# Altium PCB mcu.PcbDoc (part 2 of 3)
Units mil, origin at the board's own origin, x right, y up, seen from the top; angles counter-clockwise.
Board outline 2000 x 2000 mil, 2 copper layers (Top Layer, Bottom Layer); 145 components, 109 nets, 608 pads, 708 vias.
Unrouted connection lines stored in the file: 2.
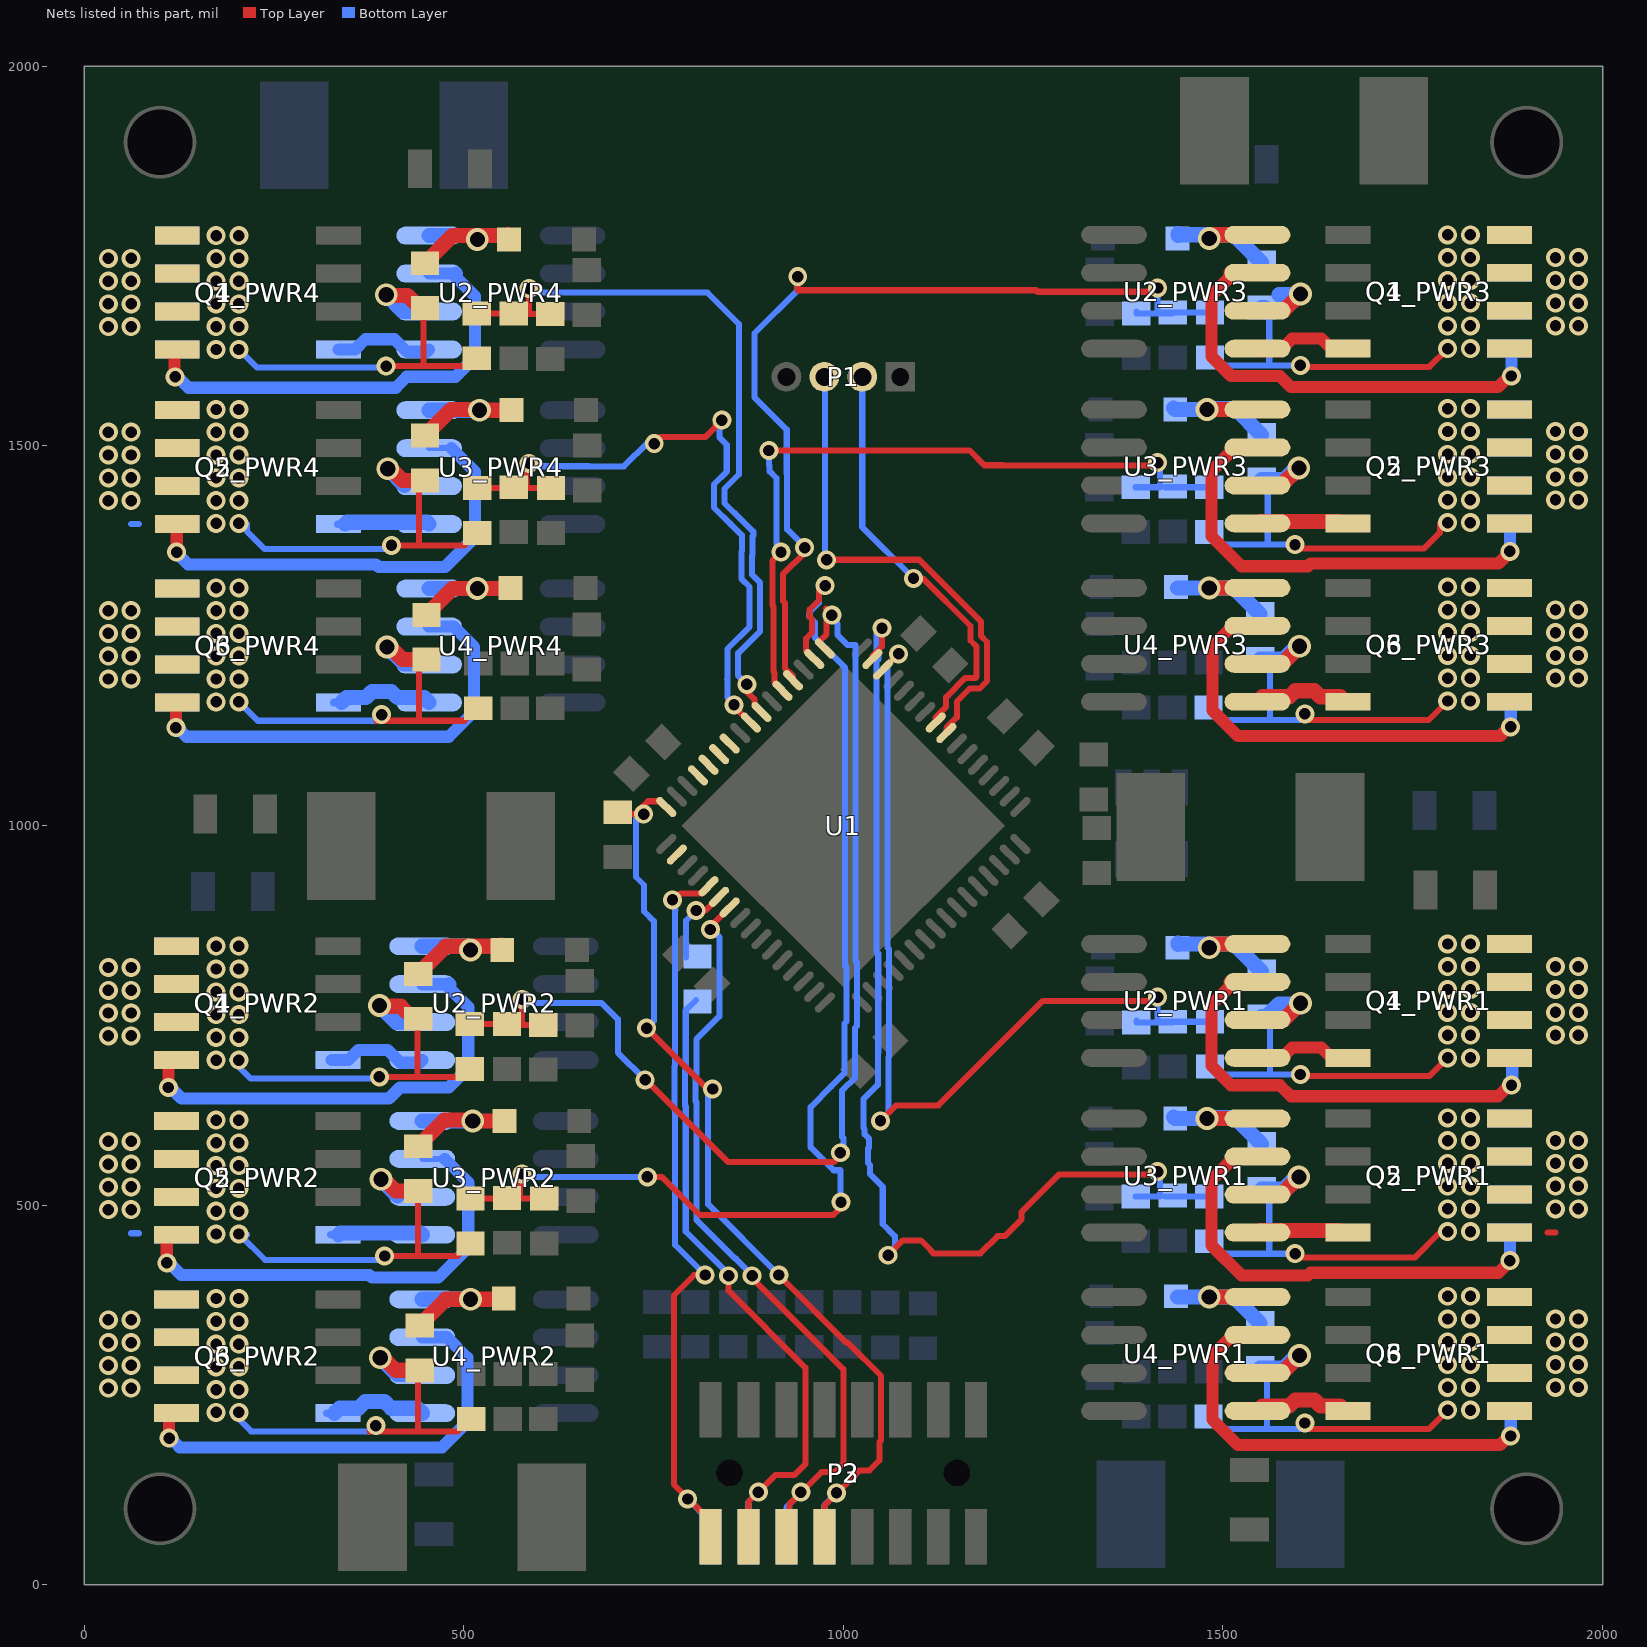
[diagram p2: the nets of this part, all layers, seen from the top]

## Via types
v1: diameter 25, hole 15, Top Layer to Bottom Layer, tented both sides, 650 vias
v2: diameter 30, hole 20, Top Layer to Bottom Layer, tented both sides, 44 vias
v3: diameter 32, hole 22, Top Layer to Bottom Layer, tented both sides, 14 vias

## Nets (pads, with @x,y where several pads share a name; then routed paths per layer and width w, separated by ;. In a path a pad name is that pad's centre, name@x,y a point inside that pad or via, vN(x,y) a via of type N, cw(c..) or ccw(c..) an arc to the next point about the centre after c; other vN are vias at no path point) (continued)
ENABLE: P2.7 P3.8 R19.2 U1.16 | length 1254
  Top Layer w8: R19.2@705,1017 707,1015 v1(737,1015) ; v1@731.5,1020.5 743,1032 U1.16@759,1032 ; v1(741,733) v1@820,654 ; v1(915,408) 1004,319 1005.8,319 1049.8,275 1049.57,275 1049.57,190.1 1047.5,188.04 1047.5,163.68 1034.32,150.5 1021.5,150.5 975,104 P3.8@975,63.34
  Bottom Layer w8: v1@727,1015 727,932.18 737.5,921.68 737.5,886.88 750.5,873.88 750.5,742.5 ; 822,539 822,551 ; v1@822,648 822,551 ; v1(915,408) 822,501 822,551 ; P2.7@975,63.34 975,105 v1(991,121)
  other v1: 828,653
GATEAH_PWR1: Q1_PWR1.4 U2_PWR1.7 | length 696
  Top Layer w16: U2_PWR1.7@1545.49,794 1508.6,794 U2_PWR1.7@1510,795.4 ; v1@1880,660 v1@1881,661 ; U2_PWR1.7@1510,789 U2_PWR1.7@1510,794 ; U2_PWR1.7@1510,789 U2_PWR1.7@1510,795.4 ; U2_PWR1.7@1510,789 U2_PWR1.7@1510,794 ; U2_PWR1.7@1510,789 1485,764 1485,743 1485,683.66 1510.66,658 1575,658 1589.5,643.5 1862.5,643.5 ; U2_PWR1.7@1510,794 U2_PWR1.7@1510,795.4 ; U2_PWR1.7@1510,794 U2_PWR1.7@1510,795.4 ; 1862.5,643.5 v1@1878.5,659.5 ; 1862.5,643.5 v1@1881,662 ; 1862.5,643.5 v1@1878.5,659.5 ; v1@1878.5,659.5 v1@1881,662 ; v1@1878.5,659.5 v1@1881,662
  Bottom Layer w8: Q1_PWR1.4@1876,694 Q1_PWR1.4@1876.65,693.35 ; Q1_PWR1.4@1876,694 Q1_PWR1.4@1876.65,693.35 ; Q1_PWR1.4@1876,694 Q1_PWR1.4@1881,689 ; Q1_PWR1.4@1876.65,693.35 Q1_PWR1.4@1881,689 ; Q1_PWR1.4@1876.65,693.35 Q1_PWR1.4@1881,689
  Bottom Layer w16: v1@1881,662 Q1_PWR1.4@1881,689
  other v1: 1880,658
GATEAH_PWR2: Q1_PWR2.4 U2_PWR2.7 | length 750.6
  Top Layer w16: v1@113,652 113,653.01 v1(111.01,655) ; v1(111.01,655) Q1_PWR2.4@111.01,691 ; v1(111.01,655) Q1_PWR2.4@111.01,692.01 ; v1(111.01,655) Q1_PWR2.4@111.01,691 ; Q1_PWR2.4@111.01,691 Q1_PWR2.4@111.01,692.01 ; Q1_PWR2.4@111.01,691 Q1_PWR2.4@111.01,692.01
  Bottom Layer w16: U2_PWR2.7@445.52,791 482.41,791 U2_PWR2.7@481.01,792.4 ; v1@112.51,656.5 128.51,640.5 ; v1@112.51,656.5 128.51,640.5 ; v1@112.51,656.5 128.51,640.5 ; 128.51,640.5 401.51,640.5 416.01,655 480.35,655 506.01,680.66 506.01,761 U2_PWR2.7@481.01,786 ; U2_PWR2.7@481.01,786 U2_PWR2.7@481.01,791 ; U2_PWR2.7@481.01,786 U2_PWR2.7@481.01,792.4 ; U2_PWR2.7@481.01,786 U2_PWR2.7@481.01,791 ; U2_PWR2.7@481.01,791 U2_PWR2.7@481.01,792.4 ; U2_PWR2.7@481.01,791 U2_PWR2.7@481.01,792.4
GATEAH_PWR3: Q1_PWR3.4 U2_PWR3.7 | length 679.8
  Top Layer w16: U2_PWR3.7@1545.48,1728 1508.59,1728 U2_PWR3.7@1509.99,1729.4 ; v1@1879.99,1594 v1@1880.99,1595 ; U2_PWR3.7@1509.99,1723 1484.99,1698 1484.99,1617.66 1510.65,1592 1574.99,1592 1589.49,1577.5 1862.49,1577.5 ; U2_PWR3.7@1509.99,1723 U2_PWR3.7@1509.99,1728 ; U2_PWR3.7@1509.99,1723 U2_PWR3.7@1509.99,1729.4 ; U2_PWR3.7@1509.99,1723 U2_PWR3.7@1509.99,1728 ; U2_PWR3.7@1509.99,1728 U2_PWR3.7@1509.99,1729.4 ; U2_PWR3.7@1509.99,1728 U2_PWR3.7@1509.99,1729.4 ; 1862.49,1577.5 v1@1878.49,1593.5 ; 1862.49,1577.5 v1@1880.99,1596 ; 1862.49,1577.5 v1@1878.49,1593.5 ; v1@1878.49,1593.5 v1@1880.99,1596 ; v1@1878.49,1593.5 v1@1880.99,1596
  Bottom Layer w16: v1(1879.99,1592) Q1_PWR3.4@1879.99,1623.99
GATEAH_PWR4: Q1_PWR4.4 U2_PWR4.7 | length 696
  Top Layer w8: Q1_PWR4.4@119.01,1622 Q1_PWR4.4@123.36,1626.35 ; Q1_PWR4.4@119.01,1622 Q1_PWR4.4@124.01,1627 ; Q1_PWR4.4@119.01,1622 Q1_PWR4.4@123.36,1626.35 ; Q1_PWR4.4@123.36,1626.35 Q1_PWR4.4@124.01,1627 ; Q1_PWR4.4@123.36,1626.35 Q1_PWR4.4@124.01,1627
  Top Layer w16: v1@119.01,1595 Q1_PWR4.4@119.01,1622
  Bottom Layer w16: v1@119.01,1594 v1@120.01,1593 ; U2_PWR4.7@454.52,1727 491.41,1727 U2_PWR4.7@490.01,1728.4 ; v1@119.01,1595 v1@121.51,1592.5 ; v1@119.01,1595 137.51,1576.5 ; v1@119.01,1595 v1@121.51,1592.5 ; v1@121.51,1592.5 137.51,1576.5 ; v1@121.51,1592.5 137.51,1576.5 ; 137.51,1576.5 410.51,1576.5 425.01,1591 489.35,1591 515.01,1616.66 515.01,1676 515.01,1697 U2_PWR4.7@490.01,1722 ; U2_PWR4.7@490.01,1722 U2_PWR4.7@490.01,1727 ; U2_PWR4.7@490.01,1722 U2_PWR4.7@490.01,1728.4 ; U2_PWR4.7@490.01,1722 U2_PWR4.7@490.01,1727 ; U2_PWR4.7@490.01,1727 U2_PWR4.7@490.01,1728.4 ; U2_PWR4.7@490.01,1727 U2_PWR4.7@490.01,1728.4
  other v1: 120.01,1591
GATEAL_PWR1: Q4_PWR1.4 U2_PWR1.5 | length 170.1
  Top Layer w10: U2_PWR1.5@1545.49,694 U2_PWR1.5@1581,694 ; Q4_PWR1.4@1664.7,694 Q4_PWR1.4@1666,694
  Top Layer w16: U2_PWR1.5@1545.49,694 1548.99,690.5 1574.2,690.5 1591.2,707.5 1629.5,707.5 1643,694 Q4_PWR1.4@1664.7,694
GATEAL_PWR2: Q4_PWR2.4 U2_PWR2.5 | length 170.1
  Bottom Layer w10: Q4_PWR2.4@325.01,691 Q4_PWR2.4@326.31,691 ; U2_PWR2.5@410.01,691 U2_PWR2.5@445.52,691
  Bottom Layer w16: Q4_PWR2.4@326.31,691 348.01,691 361.51,704.5 399.81,704.5 416.81,687.5 442.02,687.5 U2_PWR2.5@445.52,691
GATEAL_PWR3: Q4_PWR3.4 U2_PWR3.5 | length 170.1
  Top Layer w10: U2_PWR3.5@1545.48,1628 U2_PWR3.5@1580.99,1628 ; Q4_PWR3.4@1664.69,1628 Q4_PWR3.4@1665.99,1628
  Top Layer w16: U2_PWR3.5@1545.48,1628 1548.98,1624.5 1574.19,1624.5 1591.19,1641.5 1629.49,1641.5 1642.99,1628 Q4_PWR3.4@1664.69,1628
GATEAL_PWR4: Q4_PWR4.4 U2_PWR4.5 | length 170.1
  Bottom Layer w10: Q4_PWR4.4@334.01,1627 Q4_PWR4.4@335.31,1627 ; U2_PWR4.5@419.01,1627 U2_PWR4.5@454.52,1627
  Bottom Layer w16: Q4_PWR4.4@335.31,1627 357.01,1627 370.51,1640.5 408.81,1640.5 425.81,1623.5 451.02,1623.5 U2_PWR4.5@454.52,1627
GATEBH_PWR1: Q2_PWR1.4 U3_PWR1.7 | length 673.2
  Top Layer w8: U3_PWR1.7@1516,564 U3_PWR1.7@1545.49,564
  Top Layer w16: U3_PWR1.7@1516,564 1485,533 1485,514 1485,447 1524.5,407.5 1611.81,407.5 1615.31,411 1863,411 ; 1863,411 v1@1878.5,426.5 ; 1863,411 v1@1880,428 ; 1863,411 v1@1878.5,426.5 ; v1@1878.5,426.5 v1@1880,428 ; v1@1878.5,426.5 v1@1880,428
  Bottom Layer w16: Q2_PWR1.4@1877.3,464 Q2_PWR1.4@1879,464 ; v1(1878,427) Q2_PWR1.4@1878,463 ; Q2_PWR1.4@1883,464 Q2_PWR1.4@1879,464 ; Q2_PWR1.4@1878,463 Q2_PWR1.4@1878.15,463.15 ; Q2_PWR1.4@1878,463 Q2_PWR1.4@1879,464 ; Q2_PWR1.4@1878,463 Q2_PWR1.4@1878.15,463.15 ; Q2_PWR1.4@1878.15,463.15 Q2_PWR1.4@1879,464 ; Q2_PWR1.4@1878.15,463.15 Q2_PWR1.4@1879,464
GATEBH_PWR2: Q2_PWR2.4 U3_PWR2.7 | length 616.2
  Top Layer w16: v1(109.01,424) Q2_PWR2.4@109.01,460.99
  Bottom Layer w8: U3_PWR2.7@445.52,561 U3_PWR2.7@475.01,561
  Bottom Layer w16: v1@111.01,425 128.01,408 375.7,408 379.2,404.5 466.51,404.5 506.01,444 506.01,530 U3_PWR2.7@475.01,561
GATEBH_PWR3: Q2_PWR3.4 U3_PWR3.7 | length 664.3
  Top Layer w8: U3_PWR3.7@1515.99,1498 U3_PWR3.7@1545.48,1498
  Top Layer w16: U3_PWR3.7@1515.99,1498 1484.99,1467 1484.99,1381 1524.49,1341.5 1611.8,1341.5 1615.3,1345 1862.99,1345 ; 1862.99,1345 v1@1878.49,1360.5 ; 1862.99,1345 v1@1879.99,1362 ; 1862.99,1345 v1@1878.49,1360.5 ; v1@1878.49,1360.5 v1@1879.99,1362 ; v1@1878.49,1360.5 v1@1879.99,1362
  Bottom Layer w16: v1(1877.99,1361) Q2_PWR3.4@1877.99,1397.99
GATEBH_PWR4: Q2_PWR4.4 U3_PWR4.7 | length 673.2
  Top Layer w16: Q2_PWR4.4@117.01,1397 Q2_PWR4.4@121.01,1397 ; v1(122.01,1360) Q2_PWR4.4@122.01,1396 ; Q2_PWR4.4@122.71,1397 Q2_PWR4.4@121.01,1397 ; Q2_PWR4.4@121.01,1397 Q2_PWR4.4@121.86,1396.15 ; Q2_PWR4.4@121.01,1397 Q2_PWR4.4@122.01,1396 ; Q2_PWR4.4@121.01,1397 Q2_PWR4.4@121.86,1396.15 ; Q2_PWR4.4@121.86,1396.15 Q2_PWR4.4@122.01,1396 ; Q2_PWR4.4@121.86,1396.15 Q2_PWR4.4@122.01,1396
  Bottom Layer w8: U3_PWR4.7@454.52,1497 U3_PWR4.7@484.01,1497
  Bottom Layer w16: U3_PWR4.7@484.01,1497 515.01,1466 515.01,1447 515.01,1380 475.51,1340.5 388.2,1340.5 384.7,1344 137.01,1344 ; v1@120.01,1361 v1@121.51,1359.5 ; v1@120.01,1361 137.01,1344 ; v1@120.01,1361 v1@121.51,1359.5 ; v1@121.51,1359.5 137.01,1344 ; v1@121.51,1359.5 137.01,1344
GATEBL_PWR1: Q5_PWR1.4 U3_PWR1.5 | length 113.9
  Top Layer w10: Q5_PWR1.4@1664.7,464 Q5_PWR1.4@1666,464
  Top Layer w20: U3_PWR1.5@1545.49,464 1547.99,466.5 1653.5,466.5 Q5_PWR1.4@1656,464
GATEBL_PWR2: Q5_PWR2.4 U3_PWR2.5 | length 113.9
  Bottom Layer w10: Q5_PWR2.4@325.01,461 Q5_PWR2.4@326.31,461
  Bottom Layer w20: Q5_PWR2.4@335.01,461 337.51,463.5 443.02,463.5 U3_PWR2.5@445.52,461
GATEBL_PWR3: Q5_PWR3.4 U3_PWR3.5 | length 113.9
  Top Layer w10: Q5_PWR3.4@1664.69,1398 Q5_PWR3.4@1665.99,1398
  Top Layer w20: U3_PWR3.5@1545.48,1398 1547.98,1400.5 1653.49,1400.5 Q5_PWR3.4@1655.99,1398
GATEBL_PWR4: Q5_PWR4.4 U3_PWR4.5 | length 113.9
  Bottom Layer w10: Q5_PWR4.4@334.01,1397 Q5_PWR4.4@335.31,1397
  Bottom Layer w20: Q5_PWR4.4@344.01,1397 346.51,1399.5 452.02,1399.5 U3_PWR4.5@454.52,1397
GATECH_PWR1: Q3_PWR1.4 U4_PWR1.7 | length 635.5
  Top Layer w8: U4_PWR1.7@1511,329 U4_PWR1.7@1545.49,329
  Top Layer w16: U4_PWR1.7@1546,329 U4_PWR1.7@1545.49,329 1513,329 1486.18,302.18 1486.18,284 1486.18,217.48 1519.66,184 1865,184 1877,196 v1(1879,196)
  Bottom Layer w16: Q3_PWR1.4@1877.3,229 1879,227.3 v1(1879,196)
GATECH_PWR2: Q3_PWR2.4 U4_PWR2.7 | length 634.8
  Top Layer w16: v1(112.01,193) Q3_PWR2.4@112.01,225.99
  Bottom Layer w8: U4_PWR2.7@445.52,326 U4_PWR2.7@480.01,326
  Bottom Layer w16: v1(112.01,193) 114.01,193 126.01,181 471.35,181 504.83,214.48 504.83,299.18 478.01,326 U4_PWR2.7@445.52,326 U4_PWR2.7@445.01,326
GATECH_PWR3: Q3_PWR3.4 U4_PWR3.7 | length 632.8
  Top Layer w8: U4_PWR3.7@1510.99,1263 U4_PWR3.7@1545.48,1263
  Top Layer w16: U4_PWR3.7@1545.99,1263 U4_PWR3.7@1545.48,1263 1512.99,1263 1486.17,1236.18 1486.17,1151.48 1519.65,1118 1864.99,1118 1876.99,1130 v1(1878.99,1130)
  Bottom Layer w16: v1(1878.99,1130) Q3_PWR3.4@1878.99,1160.99
GATECH_PWR4: Q3_PWR4.4 U4_PWR4.7 | length 635.5
  Top Layer w16: v1(121.01,1129) 121.01,1160.3 Q3_PWR4.4@122.71,1162
  Bottom Layer w8: U4_PWR4.7@454.52,1262 U4_PWR4.7@489.01,1262
  Bottom Layer w16: v1(121.01,1129) 123.01,1129 135.01,1117 480.35,1117 513.83,1150.48 513.83,1217 513.83,1235.18 487.01,1262 U4_PWR4.7@454.52,1262 U4_PWR4.7@454.01,1262
GATECL_PWR1: Q6_PWR1.4 U4_PWR1.5 | length 133.8
  Top Layer w10: Q6_PWR1.4@1664.7,229 Q6_PWR1.4@1671,229
  Top Layer w20: U4_PWR1.5@1545.49,229 1551.99,235.5 1587.37,235.5 1595.37,243.5 1620.63,243.5 1628.63,235.5 1654.5,235.5 Q6_PWR1.4@1661,229
GATECL_PWR2: Q6_PWR2.4 U4_PWR2.5 | length 153
  Bottom Layer w10: Q6_PWR2.4@320.01,226 Q6_PWR2.4@326.31,226
  Bottom Layer w20: U4_PWR2.5@445.52,226 439.02,232.5 404.63,232.5 395.63,241.5 370.37,241.5 361.37,232.5 Q6_PWR2.4@336.51,232.5 ; Q6_PWR2.4@330.01,226 Q6_PWR2.4@332.16,228.15 ; Q6_PWR2.4@330.01,226 Q6_PWR2.4@336.51,232.5 ; Q6_PWR2.4@330.01,226 Q6_PWR2.4@332.16,228.15 ; Q6_PWR2.4@332.16,228.15 Q6_PWR2.4@336.51,232.5 ; Q6_PWR2.4@332.16,228.15 Q6_PWR2.4@336.51,232.5
GATECL_PWR3: Q6_PWR3.4 U4_PWR3.5 | length 133.8
  Top Layer w10: Q6_PWR3.4@1664.69,1163 Q6_PWR3.4@1670.99,1163
  Top Layer w20: U4_PWR3.5@1545.48,1163 1551.98,1169.5 1587.36,1169.5 1595.36,1177.5 1620.62,1177.5 1628.62,1169.5 1654.49,1169.5 Q6_PWR3.4@1660.99,1163
GATECL_PWR4: Q6_PWR4.4 U4_PWR4.5 | length 133.8
  Bottom Layer w10: Q6_PWR4.4@329.01,1162 Q6_PWR4.4@335.31,1162
  Bottom Layer w20: Q6_PWR4.4@339.01,1162 345.51,1168.5 371.38,1168.5 379.38,1176.5 404.64,1176.5 412.64,1168.5 448.02,1168.5 U4_PWR4.5@454.52,1162
LED1: U1.10
LED2: U1.11
LED3: U1.12
LED4: U1.13
MISO: P2.3 P3.4 R4.1 | length 883.4
  Top Layer w8: v1(849,407) 849,387 950,286 950,159 935.5,144.5 910.5,144.5 v1(888,122) 875,109 P3.4@875,63.34
  Bottom Layer w8: 791.5,630.88 791.5,677.12 ; 792.5,629.88 792.5,465.32 v1@849,408.82 ; 792.5,678.12 792.5,756.5 R4.1@806,770 ; P2.3@875,63.34 875,109 v1(888,122)
MOSI: P2.1 P3.2 U1.21 | length 1074.1
  Top Layer w8: v1(775,902) v1@776,901 ; v1@776,907 774,907 774,902 775,901 v1@776,901 ; v1@793,115 v1@794,115 ; v1(795,113) 795,114 v1@794,115 ; v1@816,408 803.4,408 777,381.6 777,132 v1@794,115 ; U1.21@822.53,919.96 813.17,910.61 798.4,910.61 798.32,910.53 785.53,910.53 v1@776,901 ; P3.2@825,63.34 820,68.34 820,89 v1@794,115
  Bottom Layer w8: 778.31,481 778.31,447.69 v1(818,408) ; 778.5,475.5 778.5,504 ; 778.5,498 778.5,504 ; 779,888.74 778.5,888.24 778.5,683.92 777.5,682.92 777.5,625.08 778.5,624.08 778.5,504 ; v1@793.5,114.5 825,83 P2.1@825,63.34 ; v1(795,113) 795,114 P2.1@825,84
NetC14_PWR1_1: C14_PWR1.1 D5_PWR1.2 U2_PWR1.8 | length 344.5
  Top Layer w8: v2@1486,839 v2@1486,844 ; v2@1486,839 v2@1486,844 ; v2@1486,839 v2@1486,844
  Top Layer w20: v2@1486,844 U2_PWR1.8@1545.49,844
  Bottom Layer w20: D5_PWR1.2@1441,843.37 D5_PWR1.2@1441,845.37 ; C14_PWR1.1@1551,807.53 1514.53,844 ; D5_PWR1.2@1442.37,844 v2@1482,844 ; D5_PWR1.2@1442.37,844 1514.53,844 ; D5_PWR1.2@1442.37,844 v2@1482,844 ; v2@1482,844 1514.53,844 ; v2@1482,844 1514.53,844
  other v2: 1482,839
NetC14_PWR2_1: C14_PWR2.1 D5_PWR2.2 U2_PWR2.8 | length 344.5
  Top Layer w20: C14_PWR2.1@440.01,804.53 476.48,841 ; D5_PWR2.2@550.01,840.37 D5_PWR2.2@550.01,842.37 ; 476.48,841 v2@509.01,841 ; 476.48,841 v2@509.01,841 ; 476.48,841 D5_PWR2.2@548.64,841 ; v2@509.01,841 D5_PWR2.2@548.64,841 ; v2@509.01,841 D5_PWR2.2@548.64,841
  Bottom Layer w8: v2@505.01,836 v2@505.01,841 ; v2@505.01,836 v2@505.01,841 ; v2@505.01,836 v2@505.01,841
  Bottom Layer w20: U2_PWR2.8@445.52,841 v2@505.01,841
  other v2: 509.01,836
NetC14_PWR3_1: C14_PWR3.1 D5_PWR3.2 U2_PWR3.8 | length 344.5
  Top Layer w8: v2@1485.99,1773 v2@1485.99,1778 ; v2@1485.99,1773 v2@1485.99,1778 ; v2@1485.99,1773 v2@1485.99,1778
  Top Layer w20: v2@1485.99,1778 U2_PWR3.8@1545.48,1778
  Bottom Layer w20: D5_PWR3.2@1440.99,1777.37 D5_PWR3.2@1440.99,1779.37 ; C14_PWR3.1@1550.99,1741.53 1514.52,1778 ; D5_PWR3.2@1442.36,1778 v2@1481.99,1778 ; D5_PWR3.2@1442.36,1778 1514.52,1778 ; D5_PWR3.2@1442.36,1778 v2@1481.99,1778 ; v2@1481.99,1778 1514.52,1778 ; v2@1481.99,1778 1514.52,1778
  other v2: 1481.99,1773
NetC14_PWR4_1: C14_PWR4.1 D5_PWR4.2 U2_PWR4.8 | length 344.5
  Top Layer w20: C14_PWR4.1@449.01,1740.53 485.48,1777 ; D5_PWR4.2@559.01,1776.37 D5_PWR4.2@559.01,1778.37 ; 485.48,1777 v2@518.01,1777 ; 485.48,1777 v2@518.01,1777 ; 485.48,1777 D5_PWR4.2@557.64,1777 ; v2@518.01,1777 D5_PWR4.2@557.64,1777 ; v2@518.01,1777 D5_PWR4.2@557.64,1777
  Bottom Layer w8: v2@514.01,1772 v2@514.01,1777 ; v2@514.01,1772 v2@514.01,1777 ; v2@514.01,1772 v2@514.01,1777
  Bottom Layer w20: U2_PWR4.8@454.52,1777 v2@514.01,1777
  other v2: 518.01,1772
NetC15_PWR1_1: C15_PWR1.1 D6_PWR1.2 U3_PWR1.8 | length 275.7
  Top Layer w20: v2(1479,614) U3_PWR1.8@1545.49,614
  Bottom Layer w20: D6_PWR1.2@1435,616 1437,614 D6_PWR1.2@1437.21,614 v2(1479,614) ; C15_PWR1.1@1551,580.53 1516.53,615 ; v2@1478,615 v2@1479,615 ; v2@1478,615 v2@1479,615 ; v2@1478,615 1516.53,615 ; v2@1479,615 1516.53,615 ; v2@1479,615 1516.53,615
NetC15_PWR2_1: C15_PWR2.1 D6_PWR2.2 U3_PWR2.8 | length 237.1
  Top Layer w20: C15_PWR2.1@440.01,577.53 474.48,612 ; v2(512.01,611) D6_PWR2.2@553.8,611 554.01,611 D6_PWR2.2@556.01,613 ; 474.48,612 512.01,612 513.01,612 474.48,612
  Bottom Layer w20: U3_PWR2.8@445.52,611 v2(512.01,611)
NetC15_PWR3_1: C15_PWR3.1 D6_PWR3.2 U3_PWR3.8 | length 275.7
  Top Layer w20: v2(1478.99,1548) U3_PWR3.8@1545.48,1548
  Bottom Layer w20: D6_PWR3.2@1434.99,1550 1436.99,1548 D6_PWR3.2@1437.2,1548 v2(1478.99,1548) ; C15_PWR3.1@1550.99,1514.53 1516.52,1549 ; v2@1477.99,1549 v2@1478.99,1549 ; v2@1477.99,1549 v2@1478.99,1549 ; v2@1477.99,1549 1516.52,1549 ; v2@1478.99,1549 1516.52,1549 ; v2@1478.99,1549 1516.52,1549
NetC15_PWR4_1: C15_PWR4.1 D6_PWR4.2 U3_PWR4.8 | length 275.7
  Top Layer w20: C15_PWR4.1@449.01,1513.53 483.48,1548 ; v2(521.01,1547) D6_PWR4.2@562.8,1547 563.01,1547 D6_PWR4.2@565.01,1549 ; 483.48,1548 v2@521.01,1548 ; 483.48,1548 v2@521.01,1548 ; 483.48,1548 v2@522.01,1548 ; v2@521.01,1548 v2@522.01,1548 ; v2@521.01,1548 v2@522.01,1548
  Bottom Layer w20: U3_PWR4.8@454.52,1547 v2(521.01,1547)
NetC16_PWR1_1: C16_PWR1.1 D7_PWR1.2 U4_PWR1.8 | length 186.8
  Top Layer w20: v2(1482,379) U4_PWR1.8@1545.49,379
  Bottom Layer w20: D7_PWR1.2@1440,379 1480,379 1514.53,379 C16_PWR1.1@1549,344.53
NetC16_PWR2_1: C16_PWR2.1 D7_PWR2.2 U4_PWR2.8 | length 186.8
  Top Layer w20: C16_PWR2.1@442.01,341.53 476.48,376 511.01,376 D7_PWR2.2@551.01,376
  Bottom Layer w20: U4_PWR2.8@445.52,376 v2(509.01,376)
NetC16_PWR3_1: C16_PWR3.1 D7_PWR3.2 U4_PWR3.8 | length 186.8
  Top Layer w20: v2(1481.99,1313) U4_PWR3.8@1545.48,1313
  Bottom Layer w20: D7_PWR3.2@1439.99,1313 1479.99,1313 1514.52,1313 C16_PWR3.1@1548.99,1278.53
NetC16_PWR4_1: C16_PWR4.1 D7_PWR4.2 U4_PWR4.8 | length 186.8
  Top Layer w20: C16_PWR4.1@451.01,1277.53 485.48,1312 520.01,1312 D7_PWR4.2@560.01,1312
  Bottom Layer w20: U4_PWR4.8@454.52,1312 v2(518.01,1312)
NetP1_2: P1.2 U1.57 | length 556.5
  Top Layer w8: v1(1092.48,1325.48) 1104.8,1325.48 1167.5,1262.78 1167.5,1243.68 1175.24,1235.94 1175.24,1195.9 1173.84,1194.5 1160.88,1194.5 1135.5,1169.12 1135.5,1156.16 1121.8,1142.45 U1.57@1121.8,1135.71
  Bottom Layer w8: P1.2@1025,1593 P1.2@1025,1591 1025,1392.96 v1(1092.48,1325.48)
NetP1_3: P1.3 U1.56 | length 663.8
  Top Layer w8: v1(978,1350) 1100.07,1350 1181.5,1268.57 1181.5,1249.48 1189.24,1241.74 1189.24,1190.1 1179.64,1180.5 1166.68,1180.5 1149.5,1163.32 1149.5,1142.32 1135.71,1128.53 U1.56@1135.71,1121.8
  Bottom Layer w8: P1.3@976,1596 976,1526 976,1352 v1(978,1350)
NetR4_2: R4.2 U1.22 | length 105.3
  Top Layer w8: v1(806.09,888.03) 818.43,888.03 U1.22@836.45,906.04
  Bottom Layer w8: R4.2@793,826 793,874.94 v1(806.09,888.03)
OUTA1: C14_PWR1.2 Q1_PWR1.1 Q1_PWR1.2 Q1_PWR1.3 Q4_PWR1.5 Q4_PWR1.6 Q4_PWR1.7 Q4_PWR1.8 R1_PWR1.2 U2_PWR1.6 | length 540.9
  Top Layer w8: v1(1602,672) 1602,675 1604,675 v1@1606,677 ; v1@1606,670 1772,670 v1(1796,694) ; v1@1606,674 v1@1606,677 ; v1@1606,677 1607,678 1606,678 v1@1606,677
  Top Layer w20: U2_PWR1.6@1545.49,744 1580,744 v2(1602,766)
  Bottom Layer w8: R1_PWR1.2@1487,681 1496,672 1562,672 ; C14_PWR1.2@1559,742 1562,739 1562,672 ; v1@1606,674 v1@1606,676 ; v1@1607,677 v1@1606,676 ; 1562,672 v1(1602,672) ; v1(1602,672) 1602,675 1604,675 v1@1606,677 ; v1(1602,672) v1@1606,676 ; v1@1606,676 v1@1606,677 ; v1@1606,677 1606,678 1607,678 v1@1606,677
  Bottom Layer w20: C14_PWR1.2@1551,748.47 1557.47,748.47 1574,765 v2@1594,765
  other v1: 1826,694 1796,724 1826,724 1938,724 1968,724 1796,754 1826,754 1938,754 1968,754 1796,784 1826,784 1938,784 1968,784 1796,814 1826,814 1938,814 1968,814 1796,844 1826,844
OUTA2: C14_PWR2.2 Q1_PWR2.1 Q1_PWR2.2 Q1_PWR2.3 Q4_PWR2.5 Q4_PWR2.6 Q4_PWR2.7 Q4_PWR2.8 R1_PWR2.2 U2_PWR2.6 | length 547.7
  Top Layer w8: v1@384.01,674 v1@385.01,673 ; v1@385.01,671 v1@385.01,673 ; C14_PWR2.2@439,747 439,745.47 439,669 ; R1_PWR2.2@504.01,678 495.01,669 439,669 ; v1@385.01,673 v1@385.01,674 ; v1@385.01,673 v1(389.01,669) ; v1@385.01,674 385.01,675 384.01,675 v1@385.01,674 ; v1@385.01,674 387.01,672 389.01,672 v1(389.01,669) ; v1(389.01,669) 439,669
  Top Layer w20: v2@397.01,762 417.01,762 433.54,745.47 439,745.47 C14_PWR2.2@440.01,745.47
  Bottom Layer w8: v1@195.01,691 199.51,686.5 219.01,667 v1@385.01,667 ; v1@385.01,671 v1@385.01,674 ; v1(389.01,669) 389.01,672 387.01,672 v1@385.01,674 ; v1@385.01,674 384.01,675 385.01,675 v1@385.01,674
  Bottom Layer w20: v2(389.01,763) 411.01,741 U2_PWR2.6@445.52,741
  other v1: 174.01,691 204.01,691 174.01,721 204.01,721 32,723 62,723 174.01,751 204.01,751 32,753 62,753 174.01,781 204.01,781 32,783 62,783 174.01,811 204.01,811 32,813 62,813 174.01,841 204.01,841
OUTA3: C14_PWR3.2 Q1_PWR3.1 Q1_PWR3.2 Q1_PWR3.3 Q4_PWR3.5 Q4_PWR3.6 Q4_PWR3.7 Q4_PWR3.8 R1_PWR3.2 U2_PWR3.6 | length 524.3
  Top Layer w8: v1(1601.99,1606) 1601.99,1609 1603.99,1609 v1@1605.99,1611 ; v1@1605.99,1604 1771.99,1604 v1(1795.99,1628) ; v1@1605.99,1608 v1@1605.99,1611 ; v1@1605.99,1611 1606.99,1612 1605.99,1612 v1@1605.99,1611
  Top Layer w20: U2_PWR3.6@1545.48,1678 1579.99,1678 v2(1601.99,1700)
  Bottom Layer w8: R1_PWR3.2@1486.99,1615 1495.99,1606 1561,1606 ; C14_PWR3.2@1555,1684 1561,1678 1561,1606 ; v1@1605.99,1608 v1@1605.99,1610 ; v1@1606.99,1611 v1@1605.99,1610 ; 1561,1606 v1(1601.99,1606) ; v1(1601.99,1606) 1601.99,1609 1603.99,1609 v1@1605.99,1611 ; v1(1601.99,1606) v1@1605.99,1610 ; v1@1605.99,1610 v1@1605.99,1611 ; v1@1605.99,1611 1605.99,1612 1606.99,1612 v1@1605.99,1611
  Bottom Layer w20: C14_PWR3.2@1550.99,1682.47 C14_PWR3.2@1555,1682.47 ; 1573.99,1699 v2@1593.99,1699
  other v1: 1825.99,1628 1795.99,1658 1825.99,1658 1938,1658 1968,1658 1795.99,1688 1825.99,1688 1938,1688 1968,1688 1795.99,1718 1825.99,1718 1938,1718 1968,1718 1795.99,1748 1825.99,1748 1938,1748 1968,1748 1795.99,1778 1825.99,1778
OUTA4: C14_PWR4.2 Q1_PWR4.1 Q1_PWR4.2 Q1_PWR4.3 Q4_PWR4.5 Q4_PWR4.6 Q4_PWR4.7 Q4_PWR4.8 R1_PWR4.2 U2_PWR4.6 | length 544.7
  Top Layer w8: v1@393.01,1610 v1@394.01,1609 ; v1@394.01,1607 v1@394.01,1609 ; C14_PWR4.2@447,1680 447,1605 ; R1_PWR4.2@513.01,1614 504.01,1605 447,1605 ; v1@394.01,1609 v1@394.01,1610 ; v1@394.01,1609 v1(398.01,1605) ; v1@394.01,1610 393.01,1611 394.01,1611 v1@394.01,1610 ; v1@394.01,1610 396.01,1608 398.01,1608 v1(398.01,1605) ; v1(398.01,1605) 447,1605
  Top Layer w20: v2@406.01,1698 426.01,1698 442.54,1681.47 C14_PWR4.2@449.01,1681.47
  Bottom Layer w8: v1(204.01,1627) 228.01,1603 v1@394.01,1603 ; v1@394.01,1607 v1@394.01,1610 ; v1(398.01,1605) 398.01,1608 396.01,1608 v1@394.01,1610 ; v1@394.01,1610 393.01,1611 394.01,1611 v1@394.01,1610
  Bottom Layer w20: v2(398.01,1699) 420.01,1677 U2_PWR4.6@454.52,1677
  other v1: 174.01,1627 32,1657 62,1657 174.01,1657 204.01,1657 32,1687 62,1687 174.01,1687 204.01,1687 32,1717 62,1717 174.01,1717 204.01,1717 32,1747 62,1747 174.01,1747 204.01,1747 174.01,1777 204.01,1777
OUTB1: C15_PWR1.2 Q2_PWR1.1 Q2_PWR1.2 Q2_PWR1.3 Q5_PWR1.5 Q5_PWR1.6 Q5_PWR1.7 Q5_PWR1.8 R2_PWR1.2 U3_PWR1.6 | length 510.8
  Top Layer w8: v1(1595,436) 1600,431 1752.65,431 1785.65,464 v1@1796,464 ; 1927.65,464 1938,464
  Top Layer w20: U3_PWR1.6@1578,515 v2(1600,537)
  Bottom Layer w8: R2_PWR1.2@1484,451 1499,436 1561,436 ; C15_PWR1.2@1561,516 1561,436 ; v1(1595,436) 1561,436
  Bottom Layer w20: C15_PWR1.2@1551,521.47 1580.47,521.47 1596,537 v2(1600,537)
  other v1: 1796,465 1826,465 1796,495 1826,495 1938,495 1968,495 1796,525 1826,525 1938,525 1968,525 1796,555 1826,555 1938,555 1968,555 1796,585 1826,585 1938,585 1968,585 1796,615 1826,615
OUTB2: C15_PWR2.2 Q2_PWR2.1 Q2_PWR2.2 Q2_PWR2.3 Q5_PWR2.5 Q5_PWR2.6 Q5_PWR2.7 Q5_PWR2.8 R2_PWR2.2 U3_PWR2.6 | length 513.8
  Top Layer w8: v1(396.01,433) 440,433 ; C15_PWR2.2@440,516 440,433 ; R2_PWR2.2@507.01,448 492.01,433 440,433
  Top Layer w20: v2(391.01,534) 395.01,534 410.54,518.47 C15_PWR2.2@440.01,518.47
  Bottom Layer w8: 62,463 72.35,463 ; v1@204.01,461 v1@205.36,461 ; v1@214.36,461 v1@205.36,461 ; v1(396.01,433) 391.01,428 238.36,428 v1@205.36,461
  Bottom Layer w20: v2(391.01,534) U3_PWR2.6@413.01,512
  other v1: 174.01,462 204.01,462 174.01,492 204.01,492 32,494 62,494 174.01,522 204.01,522 32,524 62,524 174.01,552 204.01,552 32,554 62,554 174.01,582 204.01,582 32,584 62,584 174.01,612 204.01,612
OUTB3: C15_PWR3.2 Q2_PWR3.1 Q2_PWR3.2 Q2_PWR3.3 Q5_PWR3.5 Q5_PWR3.6 Q5_PWR3.7 Q5_PWR3.8 R2_PWR3.2 U3_PWR3.6 | length 506.7
  Top Layer w8: v1(1594.99,1370) 1599.99,1365 1765,1365 1785.64,1385.64 1785.64,1398 v1@1795.99,1398
  Top Layer w20: U3_PWR3.6@1577.99,1449 v2(1599.99,1471)
  Bottom Layer w8: R2_PWR3.2@1483.99,1385 1498.99,1370 1559,1370 ; C15_PWR3.2@1559,1449 1559,1370 ; v1(1594.99,1370) 1559,1370
  Bottom Layer w20: C15_PWR3.2@1550.99,1455.47 1580.46,1455.47 1595.99,1471 v2(1599.99,1471)
  other v1: 1795.99,1399 1825.99,1399 1795.99,1429 1825.99,1429 1938,1429 1968,1429 1795.99,1459 1825.99,1459 1938,1459 1968,1459 1795.99,1489 1825.99,1489 1938,1489 1968,1489 1795.99,1519 1825.99,1519 1938,1519 1968,1519 1795.99,1549 1825.99,1549
OUTB4: C15_PWR4.2 Q2_PWR4.1 Q2_PWR4.2 Q2_PWR4.3 Q5_PWR4.5 Q5_PWR4.6 Q5_PWR4.7 Q5_PWR4.8 R2_PWR4.2 U3_PWR4.6 | length 519.7
  Top Layer w8: v1(405.01,1369) 441,1369 ; C15_PWR4.2@442,1452 441,1451 441,1369 ; R2_PWR4.2@516.01,1384 501.01,1369 441,1369
  Top Layer w20: v2(400.01,1470) 404.01,1470 419.54,1454.47 C15_PWR4.2@449.01,1454.47
  Bottom Layer w8: 62,1397 72.35,1397 ; v1@204.01,1397 214.36,1397 214.36,1387.64 238,1364 400.01,1364 v1(405.01,1369)
  Bottom Layer w20: v2(400.01,1470) U3_PWR4.6@422.01,1448
  other v1: 174.01,1398 204.01,1398 32,1428 62,1428 174.01,1428 204.01,1428 32,1458 62,1458 174.01,1458 204.01,1458 32,1488 62,1488 174.01,1488 204.01,1488 32,1518 62,1518 174.01,1518 204.01,1518 174.01,1548 204.01,1548
OUTC1: C16_PWR1.2 Q3_PWR1.1 Q3_PWR1.2 Q3_PWR1.3 Q6_PWR1.5 Q6_PWR1.6 Q6_PWR1.7 Q6_PWR1.8 R3_PWR1.2 U4_PWR1.6 | length 528.7
  Top Layer w8: v1(1608,213) 1608,212 1615,205 1771,205 v1(1796,230)
  Top Layer w20: U4_PWR1.6@1566,280 1579,280 v2(1601,302)
  Bottom Layer w8: R3_PWR1.2@1483,221 1499,205 1558,205 ; C16_PWR1.2@1558,279 1558,205 ; v1(1608,213) 1608,212 1615,205 1608,205 1558,205
  Bottom Layer w20: C16_PWR1.2@1549,285.47 1580.47,285.47 1597,302 v2(1601,302)
  other v1: 1826,230 1796,260 1826,260 1938,260 1968,260 1796,290 1826,290 1938,290 1968,290 1796,320 1826,320 1938,320 1968,320 1796,350 1826,350 1938,350 1968,350 1796,380 1826,380
OUTC2: C16_PWR2.2 Q3_PWR2.1 Q3_PWR2.2 Q3_PWR2.3 Q6_PWR2.5 Q6_PWR2.6 Q6_PWR2.7 Q6_PWR2.8 R3_PWR2.2 U4_PWR2.6 | length 534.5
  Top Layer w8: v1(384.34,209.66) 384.34,209.99 384.01,209.99 383.01,210.01 383.01,209.66 383.01,209 376.01,202 384.34,202 440,202 ; C16_PWR2.2@439,278 440,277 440,202 ; R3_PWR2.2@508.01,218 492.01,202 440,202
  Top Layer w20: v2(390.01,299) 394.01,299 410.54,282.47 C16_PWR2.2@442.01,282.47
  Bottom Layer w8: v1@195.01,227 199.51,222.5 220.01,202 376.01,202 383.01,209 383.01,209.66 383.01,210.01 383.99,210.01 384.34,209.99 v1(384.34,209.66)
  Bottom Layer w20: v2(390.01,299) 412.01,277 U4_PWR2.6@425.01,277
  other v1: 174.01,227 204.01,227 174.01,257 204.01,257 32,259 62,259 174.01,287 204.01,287 32,289 62,289 174.01,317 204.01,317 32,319 62,319 174.01,347 204.01,347 32,349 62,349 174.01,377 204.01,377
OUTC3: C16_PWR3.2 Q3_PWR3.1 Q3_PWR3.2 Q3_PWR3.3 Q6_PWR3.5 Q6_PWR3.6 Q6_PWR3.7 Q6_PWR3.8 R3_PWR3.2 U4_PWR3.6 | length 533.2
  Top Layer w8: v1(1607.99,1147) 1607.99,1146 1614.99,1139 1770.99,1139 v1(1795.99,1164)
  Top Layer w20: U4_PWR3.6@1565.99,1214 1578.99,1214 v2(1600.99,1236)
  Bottom Layer w8: R3_PWR3.2@1482.99,1155 1498.99,1139 1562,1139 ; C16_PWR3.2@1561,1217 1562,1216 1562,1139 ; v1(1607.99,1147) 1607.99,1146 1614.99,1139 1607.99,1139 1562,1139
  Bottom Layer w20: C16_PWR3.2@1548.99,1219.47 1580.46,1219.47 1596.99,1236 v2(1600.99,1236)
  other v1: 1825.99,1164 1795.99,1194 1825.99,1194 1938,1194 1968,1194 1795.99,1224 1825.99,1224 1938,1224 1968,1224 1795.99,1254 1825.99,1254 1938,1254 1968,1254 1795.99,1284 1825.99,1284 1938,1284 1968,1284 1795.99,1314 1825.99,1314
OUTC4: C16_PWR4.2 Q3_PWR4.1 Q3_PWR4.2 Q3_PWR4.3 Q6_PWR4.5 Q6_PWR4.6 Q6_PWR4.7 Q6_PWR4.8 R3_PWR4.2 U4_PWR4.6 | length 534.7
  Top Layer w8: v1(392.01,1146) 392.01,1145 385.01,1138 392.01,1138 441,1138 ; C16_PWR4.2@441,1218 441,1138 ; R3_PWR4.2@517.01,1154 501.01,1138 441,1138
  Top Layer w20: v2(399.01,1235) 403.01,1235 419.54,1218.47 C16_PWR4.2@451.01,1218.47
  Bottom Layer w8: v1(204.01,1163) 229.01,1138 385.01,1138 392.01,1145 v1(392.01,1146)
  Bottom Layer w20: v2(399.01,1235) 421.01,1213 U4_PWR4.6@434.01,1213
  other v1: 174.01,1163 32,1193 62,1193 174.01,1193 204.01,1193 32,1223 62,1223 174.01,1223 204.01,1223 32,1253 62,1253 174.01,1253 204.01,1253 32,1283 62,1283 174.01,1283 204.01,1283 174.01,1313 204.01,1313
RX: U1.18
SCK: P2.5 P3.6 U1.23 | length 1053.8
  Top Layer w8: v1(824.95,863.05) v1(824.95,863.05) 825,866.76 U1.23@850.37,892.12 ; v1(880,407) 880,404 1000,284 1000,160 988.5,148.5 971.5,148.5 929,106 929,67.34 P3.6@925,63.34
  Bottom Layer w8: 806.5,539 806.5,545 ; v1(824.95,863.05) v1(824.95,863.05) ; v1@826,864 836.7,853.3 836.7,748.58 806.5,718.38 806.5,672.32 805.5,671.32 805.5,636.68 806.5,635.68 806.5,545 ; v1(880,407) 880,407.82 858.32,429.5 857.5,429.5 806.5,480.5 806.5,545 ; P2.5@925,63.34 925,102 945,122 v1(944,122)
SENSEA1: C12_PWR1.1 R1_PWR1.1 R24_PWR1.1 U1.62 | length 1253.3
  Top Layer w8: U1.62@1052.2,1205.31 v1(1073,1226.11) ; v1@1055,611 v1(1049,611) 1069.5,631.5 1125.32,631.5 1262.82,769 1335,769 1414,769 v1@1416.94,769 ; v1@1407.84,780.16 v1(1414,774)
  Bottom Layer w8: v1@1049,612 1059.5,622.5 1059.5,695.12 1060,695.62 1060,837.11 ; 1058,839.11 1058,1211.11 v1(1073,1226.11) ; C12_PWR1.1@1386,742.89 C12_PWR1.1@1386,740.53 R24_PWR1.1@1433.53,740.53 ; v1(1414,774) 1414,741.53 R24_PWR1.1@1434,741.53 R1_PWR1.1@1483,741.53 ; R24_PWR1.1@1433.94,741 1434.47,741.53 1434.24,741.29 R24_PWR1.1@1433.94,741
SENSEA2: C12_PWR2.1 R1_PWR2.1 R24_PWR2.1 U1.1 | length 1533.2
  Top Layer w8: R1_PWR2.1@508.01,738.53 577.01,738.53 v1(577.01,771) ; R24_PWR2.1@556.54,738.53 R24_PWR2.1@557.07,738 ; R24_PWR2.1@557.48,737.53 C12_PWR2.1@605.01,737.53 C12_PWR2.1@605.01,739.89 ; v1@739,666 848,557 988,557 1000,569 v1(996,569) ; U1.1@975.64,1233.15 975.64,1234.36 968,1242 978,1252 v1@978,1284 ; v1@977,1286 978,1285 v1@978,1284 ; v1(985,1277) v1@978,1284
  Bottom Layer w8: v1@574.07,766 681.8,766 703,744.8 703,701 v1(739,665) ; v1(577.01,771) v1@583.17,777.16 ; v1(985,1277) 982,1280 978,1280 992.5,1265.5 992.5,1250.68 1005.68,1237.5 1015.7,1237.5 1016,1237.2 1016,821.72 1018,819.72 1018,736.02 1015.5,733.52 1015.5,668.08 998.5,651.08 998.5,590.08 1000,588.58 1000,569 v1(996,569)
SENSEA3: C12_PWR3.1 R1_PWR3.1 R24_PWR3.1 U1.4 | length 1337.4
  Top Layer w8: U1.4@933.88,1191.39 933.88,1196.54 923,1207.42 923,1293.18 920.5,1295.68 920.5,1330.68 949,1359.18 v1(949,1366) v1@950,1367 ; v1(940,1723) 940,1705 1254,1705 1256,1703 v1@1413.99,1703 ; 1334.99,1703 v1@1413.99,1703 ; v1@1407.83,1714.16 v1(1413.99,1708) ; v1@1416.94,1703 v1@1413.99,1703
  Bottom Layer w8: v1(940,1723) 940,1705 883,1648 883,1564 925.5,1521.5 925.5,1463.68 926,1463.18 926,1390 v1@949,1367 ; C12_PWR3.1@1385.99,1676.89 C12_PWR3.1@1385.99,1674.53 R24_PWR3.1@1433.52,1674.53 ; v1(1413.99,1708) 1413.99,1675.53 R24_PWR3.1@1433.99,1675.53 R1_PWR3.1@1482.99,1675.53 ; R24_PWR3.1@1433.94,1675 R24_PWR3.1@1434.23,1675.29 ; R24_PWR3.1@1433.94,1675 R24_PWR3.1@1434.23,1675.29 ; R24_PWR3.1@1433.94,1675 R24_PWR3.1@1434.46,1675.53 ; R24_PWR3.1@1434.23,1675.29 R24_PWR3.1@1434.46,1675.53 ; R24_PWR3.1@1434.23,1675.29 R24_PWR3.1@1434.46,1675.53
SENSEA4: C12_PWR4.1 R1_PWR4.1 R24_PWR4.1 U1.7 | length 1099.4
  Top Layer w8: R1_PWR4.1@517.01,1674.53 R24_PWR4.1@566.01,1674.53 586.01,1674.53 v1(586.01,1707) ; R24_PWR4.1@566.48,1673.53 C12_PWR4.1@614.01,1673.53 C12_PWR4.1@614.01,1675.89 ; v1@869.5,1188 869.5,1179.7 882.77,1166.43 882.77,1158.99 U1.7@892.12,1149.63 ; R24_PWR4.1@565.54,1674.53 565.77,1674.29 566.07,1674 R24_PWR4.1@565.54,1674.53
  Bottom Layer w8: v1@583.07,1702 v1@586.01,1702 ; v1(586.01,1707) v1@592.17,1713.16 ; 665.01,1702 v1@586.01,1702 ; v1@869,1190 861.5,1197.5 861.5,1226.86 890.5,1255.86 890.5,1319.92 880,1330.42 880,1355.38 880.5,1355.88 880.5,1381.12 881.5,1382.12 881.5,1387.12 857.12,1411.5 856.68,1411.5 843.5,1424.68 843.5,1443.32 862.5,1462.32 862.5,1660.5 821,1702 v1@586.01,1702
  other v1: 873,1186
SENSEB1: C7_PWR1.1 R2_PWR1.1 R18_PWR1.1 U1.63 | length 1465.1
  Top Layer w8: U1.63@1038.28,1219.23 1038.28,1223.21 1051,1235.93 v1(1051,1260) ; v1(1059,434) 1078.5,453.5 1102.32,453.5 1115.5,440.32 1115.5,439.7 1118.7,436.5 1180.5,436.5 1203.3,459.3 1203.3,459.5 1213.12,459.5 1234.5,480.88 1234.5,490.7 1283.99,540.19 v1@1414.13,540.19 ; v1(1414,544) v1@1414,548
  Bottom Layer w8: v1(1051,1260) 1044,1253 1044,1225.58 1046,1223.58 1046,1218.91 1044,1216.91 1044,833.32 1046,831.32 1046,701.42 1045.5,700.92 1045.5,658.48 1026.5,639.48 1026.5,601.68 1028,600.18 1028,593.42 1034,587.42 1034,575.82 1032.5,574.32 1032.5,555.68 1035.4,552.78 1034.9,552.28 1034.9,541.1 1052,524 1052,475.18 1068,459.18 1068,445 1059,436 v1(1059,434) ; C7_PWR1.1@1385,511.53 1417,511.53 v1@1417,540.06 ; v1(1414,544) v1@1414,548 ; R18_PWR1.1@1434,511.53 1423.47,511.53 R2_PWR1.1@1482,511.53
SENSEB2: C7_PWR2.1 R2_PWR2.1 R18_PWR2.1 U1.2 | length 1561.6
  Top Layer w8: R2_PWR2.1@509.01,508.53 R18_PWR2.1@567.54,508.53 ; v1@574.01,537.06 574.01,508.53 C7_PWR2.1@606.01,508.53 ; v1(577.01,541) v1@577.01,545 ; v1(741.81,537.19) 760.81,537.19 811,487 987,487 v1@994,494 ; U1.2@961.72,1219.23 951,1229.95 951,1246.31 959,1254.31 959,1271.18 955.5,1274.68 955.5,1284.3 968,1296.8 968,1310 v1@976,1318
  Bottom Layer w8: v1@576.88,537.19 v1(741.81,537.19) ; v1(577.01,541) v1@577.01,545 ; v1@975,1317 968,1310 968,1293.34 955.5,1280.84 955.5,1274.68 963,1267.18 963,1247.18 1002,1208.18 1002,815.92 ; 996,546 987.18,546 957,576.18 957,629.2 984.32,656.52 984.32,656.7 1001.5,673.88 1001.5,707 ; 996.5,545.68 996.5,508.5 v1@997,505 ; 1001.5,704 1001.5,707 ; 1001.5,739.31 1001.5,707 ; 1004,741.81 1004,813.92
  other v1: 997,504 976,1316
SENSEB3: C7_PWR3.1 R2_PWR3.1 R18_PWR3.1 U1.5 | length 1042.9
  Top Layer w8: v1(902,1494) 1166.18,1494 1185.68,1474.5 1209.5,1474.5 ; v1(918,1360) 906.5,1348.5 906.5,1289.88 908,1288.38 908,1202.62 909.5,1201.12 909.5,1187.94 U1.5@919.96,1177.47 ; 1206,1474 1206.19,1474.19 1334.99,1474.19 1413.99,1474.19 v1@1414.12,1474.19 ; v1(1413.99,1478) v1@1413.99,1482
  Bottom Layer w8: v1(902,1494) 902,1475 903,1474 903,1466.38 912,1457.38 912,1371 918,1365 v1(918,1360) ; C7_PWR3.1@1384.99,1445.53 1416.99,1445.53 1416.99,1446.53 v1@1416.99,1474.06 ; v1(1413.99,1478) v1@1413.99,1482 ; R18_PWR3.1@1423.46,1445.53 R2_PWR3.1@1481.99,1445.53 1433.99,1445.53 R18_PWR3.1@1423.46,1445.53
SENSEB4: C7_PWR4.1 R2_PWR4.1 R18_PWR4.1 U1.8 | length 934.2
  Top Layer w8: v1@583.01,1473.06 583.01,1445.53 583.01,1444.53 C7_PWR4.1@615.01,1444.53 ; v1(586.01,1477) v1@586.01,1481 ; v1(751,1503) 759.5,1511.5 818.32,1511.5 831.5,1524.68 831.5,1528.5 840,1537 v1(840,1534) ; v1@857,1156 877.29,1135.71 U1.8@878.21,1135.71 ; R2_PWR4.1@518.01,1444.53 566.01,1444.53 576.54,1444.53 R2_PWR4.1@518.01,1444.53
  Bottom Layer w8: v1@585.88,1473.19 586.01,1473.19 665.01,1473.19 ; v1(586.01,1477) v1@586.01,1481 ; 663,1473 711,1473 743,1505 753,1505 v1(751,1503) ; v1(840,1534) 837,1531 837,1510.82 846.5,1501.32 846.5,1466.12 829.5,1449.12 829.5,1418.88 850.88,1397.5 851.32,1397.5 866.5,1382.32 866.5,1361.68 866,1361.18 866,1324.62 876.5,1314.12 876.5,1261.66 847.5,1232.66 847.5,1192.7 ; 847,1192.2 847.5,1192.7 ; v1@858,1158 847.5,1168.5 847.5,1192.7
  other v1: 856,1159